# EAGLE board schematic (EAGLE 9.5.1)

Size 115 x 66 mm. Coordinates in mm from the lower left corner, seen from the top.
Outline: 0,66 115,66 115,0 0,0 0,66
Copper layers (1*16): Top 0.035mm / dielectric 1.5mm / Bottom 0.035mm
Design rules "default": minimum track width 6mil, minimum drill 0.35mm, track to track 6mil, track to pad 6mil, pad to pad 6mil, via to via 6mil, smd to smd 6mil, copper to edge 40mil, drill to drill 6mil, minimum pad ring 10mil, minimum via ring 8mil, stop-mask expansion 4mil, vias tented up to drill 0mil, thermal gap 10mil

## Footprints (pad centres in the part's own frame; a part is rotated, then mirrored left to right if it is on the bottom)
PYBOARD = drill 1.016 pad 1.676: 3V3 21.59,5.08; 3V3-1 -6.35,-27.94; A3V3 11.43,-30.48; AGND 13.97,-30.48; BOOT0 -3.81,-27.94; GND 13.97,-25.4; GND0 13.97,-27.94; GND1 16.51,-22.86; GND2 16.51,-25.4; GND3 16.51,-27.94; GND4 16.51,-30.48; GND5 -6.35,-25.4; GND6 21.59,2.54; P2 -1.27,-27.94; P3 1.27,-27.94; P4 3.81,-27.94; P5 6.35,-27.94; RST -6.35,-22.86; RST1 21.59,0; V+ 21.59,7.62; V+1 -6.35,-30.48; V+2 11.43,-27.94; V+3 19.05,-22.86; V+4 19.05,-25.4; V+5 19.05,-27.94; V+6 19.05,-30.48; VBACK 8.89,-27.94; VBAT 11.43,-25.4; X1 21.59,-30.48; X2 21.59,-27.94; X3 21.59,-25.4; X4 21.59,-22.86; X5 21.59,-20.32; X6 21.59,-17.78; X7 21.59,-15.24; X8 21.59,-12.7; X9 -6.35,-12.7; X10 -6.35,-15.24; X11 -6.35,-17.78; X12 -6.35,-20.32; X17 -3.81,-30.48; X18 -1.27,-30.48; X19 1.27,-30.48; X20 3.81,-30.48; X21 6.35,-30.48; X22 8.89,-30.48; Y1 -6.35,7.62; Y2 -6.35,5.08; Y3 -6.35,2.54; Y4 -6.35,0; Y5 -6.35,-2.54; Y6 -6.35,-5.08; Y7 -6.35,-7.62; Y8 -6.35,-10.16; Y9 21.59,-10.16; Y10 21.59,-7.62; Y11 21.59,-5.08; Y12 21.59,-2.54
MODULE_SX1280_EXT = drill 0.7 offset: ANT 7,-7; BUSY 7,5; DIO1 7,7; DIO2 -7,7; DIO3 -7,5; GND@1 7,3; GND@2 7,-1; GND@3 7,-3; GND@4 7,-5; GND@5 -7,1; MISO -7,-1; MOSI -7,-3; NRESET 7,1; NSS -7,-7; SCK -7,-5; VCC -7,3 | drill 1.016 pad 1.676: P$1 12.7,-5.08; P$2 12.7,0; P$3 12.7,5.08; P$4 -12.7,0; P$5 -12.7,-2.54; P$6 -12.7,-5.08; P$7 -12.7,-7.62; P$8 -12.7,2.54; P$9 -12.7,5.08; P$10 -12.7,7.62; P$11 12.7,7.62; P$12 12.7,2.54; P$13 12.7,-2.54; P$14 12.7,-7.62
MODULE_MPU9250 = drill 1.016 pad 1.676: AD0 -6.73,-3.81; ECL -6.73,-1.27; EDA -6.73,1.27; FSYNC -6.73,-11.43; GND -6.73,8.89; INT -6.73,-6.35; NCS -6.73,-8.89; SCL -6.73,6.35; SDA -6.73,3.81; VCC -6.73,11.43
MODULE_BMP280 = drill 1.016 pad 1.676: CSB -5.46,-3.81; GND -5.46,3.81; SCL -5.46,1.27; SDA -5.46,-1.27; SDO -5.46,-6.35; VCC -5.46,6.35
1X04 = drill 1.016 long: 1 -3.81,0; 2 -1.27,0; 3 1.27,0; 4 3.81,0
SMA_DIP = drill 1.016 pad 1.676: ANTENNA 0,0; GND1 -2.54,2.54; GND2 2.54,2.54; GND3 -2.54,-2.54; GND4 2.54,-2.54

## Placement (x,y rotation side)
U$1  PYBOARD1.1  [PYBOARD]  36.84,37.11 0 top
U$2  SX1280EXT  [MODULE_SX1280_EXT]  48.27,29.49 270 top
U$3  MPU9250  [MODULE_MPU9250]  44.46,38 270 top
U$4  BMP280  [MODULE_BMP280]  39.38,17.17 90 top
ULTIMATE_GPS  [1X04]  27.95,40.92 90 top
X1  [SMA_DIP]  35.57,26.95 0 top

## Library data of the parts
U$1 = PyBoard 1.1 footprint
U$2-U$4 X1 = SobieskiSat2
ULTIMATE_GPS = pinhead

## Nets
GND: U$2.GND@1 U$2.GND@2 U$2.GND@3 U$2.GND@4 U$2.GND@5 U$3.GND U$4.GND ULTIMATE_GPS.2
GND1: X1.GND1
GND2: X1.GND2
GND3: X1.GND3
GND4: X1.GND4
N$1: U$1.Y9 U$2.MOSI
N$2: U$1.X8 U$2.MISO
N$3: U$1.X7 U$2.SCK
N$4: U$1.X6 U$2.NSS
N$5: U$1.X5 U$2.BUSY
N$6: U$1.X4 U$2.NRESET
N$7: U$2.ANT X1.ANTENNA
N$8: U$1.Y11 U$3.SDA
N$9: U$1.Y10 U$3.SCL
N$10: U$1.Y12 U$3.INT
N$11: U$1.X9 U$4.SCL
N$12: U$1.X10 U$4.SDA
RX_G: U$1.Y2 ULTIMATE_GPS.3
TX_G: U$1.Y1 ULTIMATE_GPS.4
VCC: U$1.3V3 U$1.3V3-1 U$2.VCC U$3.VCC U$4.VCC ULTIMATE_GPS.1

## Tracks (layer width: path | path; a pad name or v marks a point on that pad's centre or on a via)
GND  (7 unrouted)
N$1  (1 unrouted)
N$2  (1 unrouted)
N$3  (1 unrouted)
N$4  (1 unrouted)
N$5  (1 unrouted)
N$6  (1 unrouted)
N$7  (1 unrouted)
N$8  (1 unrouted)
N$9  (1 unrouted)
N$10  (1 unrouted)
N$11  (1 unrouted)
N$12  (1 unrouted)
RX_G  (1 unrouted)
TX_G  (1 unrouted)
VCC  (5 unrouted)